# Altium PCB sbattery.PcbDoc (part 2 of 2)
Units mil, origin at the board's own origin, x right, y up, seen from the top; angles counter-clockwise.
Board outline 1265 x 1660 mil, 2 copper layers (Top Layer, Bottom Layer); 16 components, 14 nets, 58 pads, 16 vias.
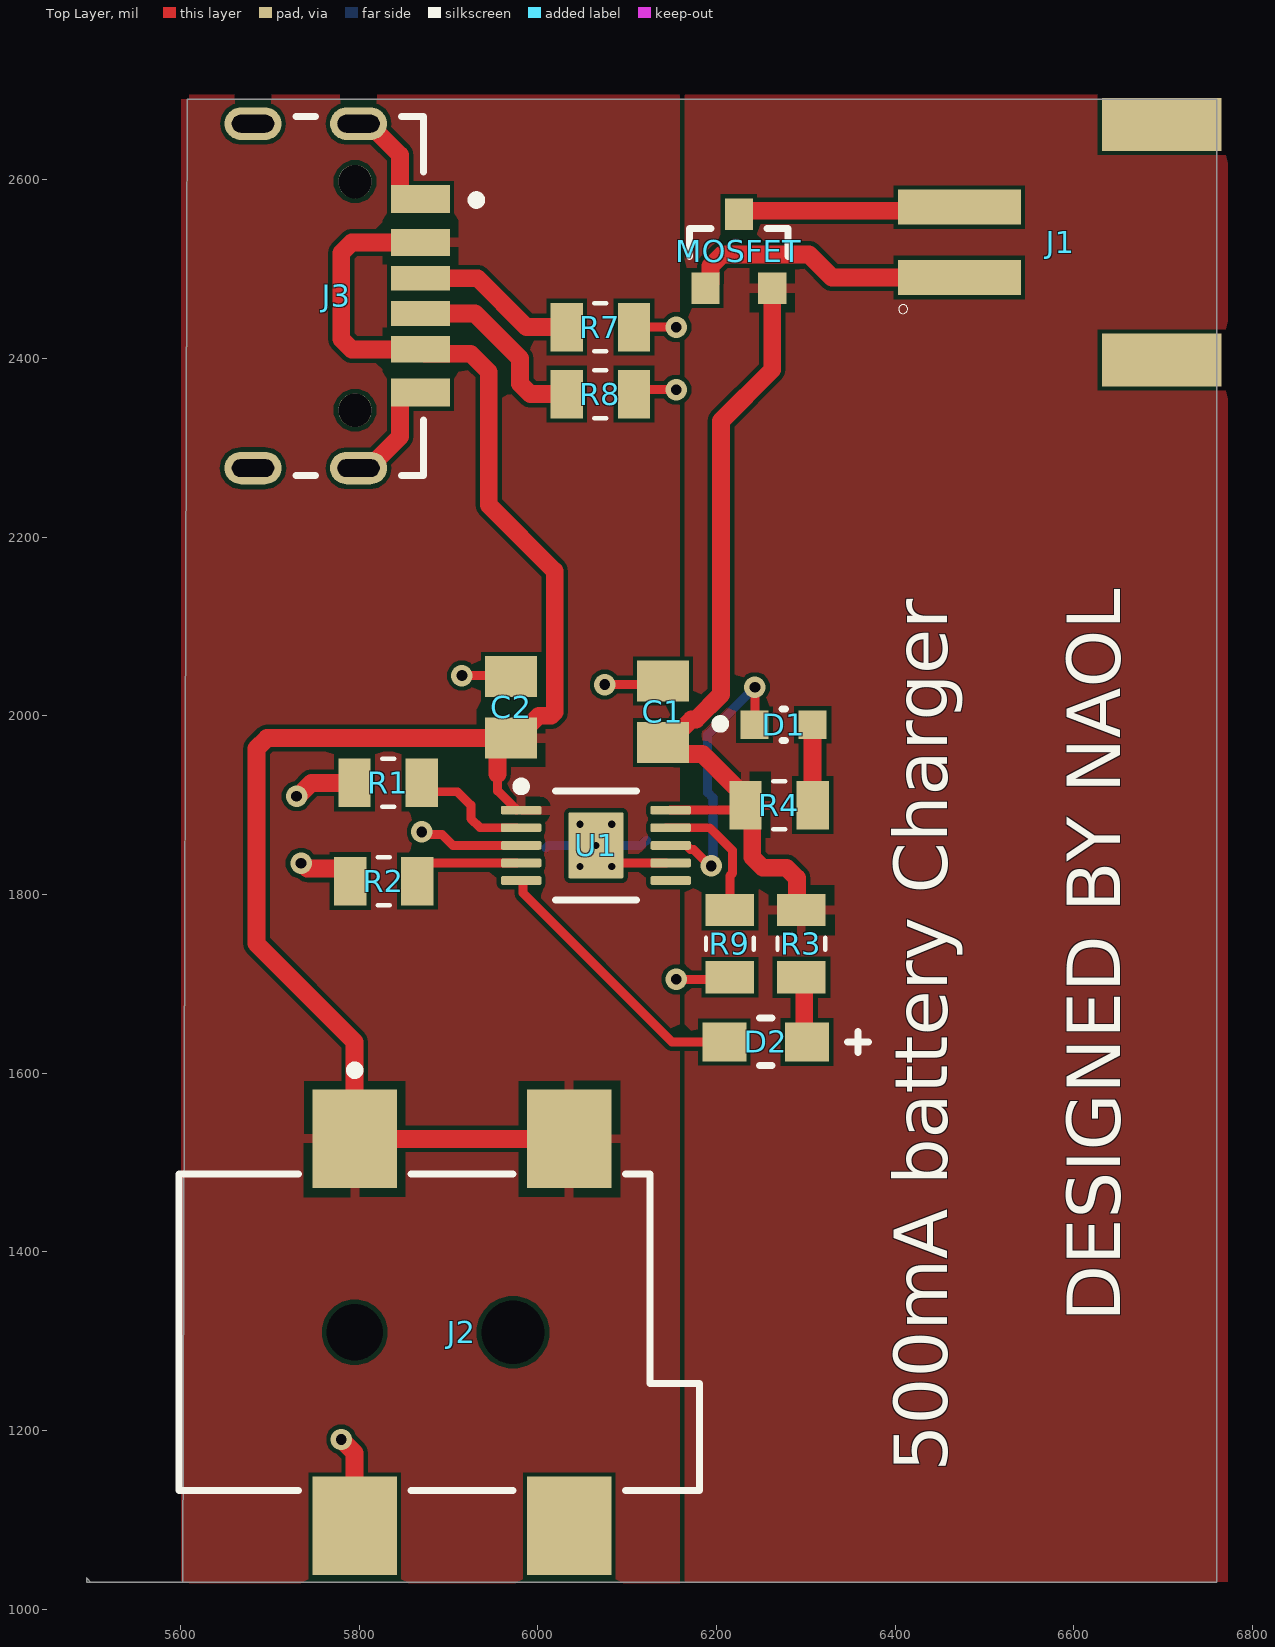
[diagram p0: Top Layer view]

## Part data (continued)
U1: "1-cell, 1-A, Li-ion battery charger with operation over JEITA and 10kΩ NTC 10-HVSSOP -40 to 150", Battery Pack Voltage=4.2V, Case/Package="HTSSOP EP", LCSC part#=C133237, Manufacturer="Texas Instruments", Manufacturer Lifecycle Status=ACTIVE, Max Charge Current=1A, Max Operating Temperature=125°C, Max Supply Voltage=6.45V, Min Input Voltage=4.5V, Min Operating Temperature=-40°C, Min Supply Voltage=3.5V, Supplier Part Number=296-41204-2-ND, Category="Battery Management", ComponentLink1Description=https://sigma.octopart.com:443/151908762/technical_drawing/Texas-Instruments-BQ24092DGQR.pdf?src-supplier=Texas+Instruments, ComponentLink1URL=https://sigma.octopart.com:443/151908762/technical_drawing/Texas-Instruments-BQ24092DGQR.pdf?src-supplier=Texas+Instruments, ComponentLink2Description=https://octopart.com:443/opatz8j6/c1?t=I4L_5yvCBpDFmJzBUD7xXRTyJHZFz8Vie7DDMexhgd_R5CVS8O1brsykVWSszK7PlQIjFRdFbRxs_cy10GZkWLPuEzsvgZTYF2NXEUHmN4sAQxE8bVBEcZC275qzirla-L-oJNJhEX5LmJmM2EXwk3EFsfYROaw8LmrFg9NhT1mx60rvpKNI9a36HI6ThgYwGQRStl18BqKQUrAbhSp5Wi_HxJff8WELpdCqiygBHP7SLygD4TmEifhtn01ouQFK53G1NLqB-fa8Ml_ZKfK0nFnib--2iALwfa4BBLIbsOyNQrybwu1ndBra9hRkefzWYbL7eDaQQPNTeA4Bly6oxRyA0mVZNRxcs2KHaGZXt2978JGPJtvfLop7MU-7fw_S1MKPRM0&src-supplier=Texas+Instruments, ComponentLink2URL=https://octopart.com:443/opatz8j6/c1?t=I4L_5yvCBpDFmJzBUD7xXRTyJHZFz8Vie7DDMexhgd_R5CVS8O1brsykVWSszK7PlQIjFRdFbRxs_cy10GZkWLPuEzsvgZTYF2NXEUHmN4sAQxE8bVBEcZC275qzirla-L-oJNJhEX5LmJmM2EXwk3EFsfYROaw8LmrFg9NhT1mx60rvpKNI9a36HI6ThgYwGQRStl18BqKQUrAbhSp5Wi_HxJff8WELpdCqiygBHP7SLygD4TmEifhtn01ouQFK53G1NLqB-fa8Ml_ZKfK0nFnib--2iALwfa4BBLIbsOyNQrybwu1ndBra9hRkefzWYbL7eDaQQPNTeA4Bly6oxRyA0mVZNRxcs2KHaGZXt2978JGPJtvfLop7MU-7fw_S1MKPRM0&src-supplier=Texas+Instruments, ComponentLink3Description=https://datasheet.octopart.com:443/BQ24092DGQR-Texas-Instruments-datasheet-41204735.pdf?src-supplier=Texas+Instruments, ComponentLink3URL=https://datasheet.octopart.com:443/BQ24092DGQR-Texas-Instruments-datasheet-41204735.pdf?src-supplier=Texas+Instruments, ComponentLink4Description=https://datasheet.octopart.com:443/BQ24092DGQR-Texas-Instruments-datasheet-34153142.pdf?src-supplier=Texas+Instruments, ComponentLink4URL=https://datasheet.octopart.com:443/BQ24092DGQR-Texas-Instruments-datasheet-34153142.pdf?src-supplier=Texas+Instruments, ComponentLink5Description=https://datasheet.octopart.com:443/BQ24092DGQR-Texas-Instruments-datasheet-17535491.pdf?src-supplier=Texas+Instruments, ComponentLink5URL=https://datasheet.octopart.com:443/BQ24092DGQR-Texas-Instruments-datasheet-17535491.pdf?src-supplier=Texas+Instruments, ComponentLink6Description=https://datasheet.octopart.com:443/BQ24092DGQR-Texas-Instruments-datasheet-13303862.pdf?src-supplier=Texas+Instruments, ComponentLink6URL=https://datasheet.octopart.com:443/BQ24092DGQR-Texas-Instruments-datasheet-13303862.pdf?src-supplier=Texas+Instruments, ComponentLink7Description=https://datasheet.octopart.com:443/BQ24092DGQR-Texas-Instruments-datasheet-13064149.pdf?src-supplier=Texas+Instruments, ComponentLink7URL=https://datasheet.octopart.com:443/BQ24092DGQR-Texas-Instruments-datasheet-13064149.pdf?src-supplier=Texas+Instruments, ComponentLink8Description=https://datasheet.octopart.com:443/BQ24092DGQR-Texas-Instruments-datasheet-13055535.pdf?src-supplier=Texas+Instruments, ComponentLink8URL=https://datasheet.octopart.com:443/BQ24092DGQR-Texas-Instruments-datasheet-13055535.pdf?src-supplier=Texas+Instruments, ComponentLink9Description=https://datasheet.octopart.com:443/BQ24092DGQR-Texas-Instruments-datasheet-11473890.pdf?src-supplier=Texas+Instruments, ComponentLink9URL=https://datasheet.octopart.com:443/BQ24092DGQR-Texas-Instruments-datasheet-11473890.pdf?src-supplier=Texas+Instruments, ComponentLink10Description=https://sigma.octopart.com:443/49250729/technical_drawing/Texas-Instruments-BQ24092DGQR.pdf?src-supplier=Texas+Instruments, ComponentLink10URL=https://sigma.octopart.com:443/49250729/technical_drawing/Texas-Instruments-BQ24092DGQR.pdf?src-supplier=Texas+Instruments, ComponentLink11Description=https://datasheet.octopart.com:443/BQ24092DGQR-Texas-Instruments-datasheet-10257820.pdf?src-supplier=Texas+Instruments, ComponentLink11URL=https://datasheet.octopart.com:443/BQ24092DGQR-Texas-Instruments-datasheet-10257820.pdf?src-supplier=Texas+Instruments, ComponentLink12Description=https://datasheet.octopart.com:443/BQ24092DGQR-Texas-Instruments-datasheet-164412855.pdf?src-supplier=SHENGYU+ELECTRONICS, ComponentLink12URL=https://datasheet.octopart.com:443/BQ24092DGQR-Texas-Instruments-datasheet-164412855.pdf?src-supplier=SHENGYU+ELECTRONICS, ComponentLink13Description=https://datasheet.octopart.com:443/BQ24092DGQR-Texas-Instruments-datasheet-137316104.pdf?src-supplier=Future+Electronics, ComponentLink13URL=https://datasheet.octopart.com:443/BQ24092DGQR-Texas-Instruments-datasheet-137316104.pdf?src-supplier=Future+Electronics, ComponentLink14Description=http://sigma.octopart.com:80/reach_statement/Texas-Instruments-company-64.pdf?src-supplier=Compliance+Statements, ComponentLink14URL=http://sigma.octopart.com:80/reach_statement/Texas-Instruments-company-64.pdf?src-supplier=Compliance+Statements, ComponentLink15Description=http://sigma.octopart.com:80/conflict_mineral_statement/Texas-Instruments-company-63.pdf?src-supplier=Compliance+Statements, ComponentLink15URL=http://sigma.octopart.com:80/conflict_mineral_statement/Texas-Instruments-company-63.pdf?src-supplier=Compliance+Statements, Contact Plating=Gold, Fault Protection="Over Temperature, Over Voltage, Short Circuit", Height=1.1mm, Interface=USB, Lead Free="Lead Free", Length=3mm, Lifecycle Status=Production, Manufacturer Part Number=BQ24092DGQR, Number of Cells=1, Output Current=1A, Output Voltage=4.2V, Packaging="Tape & Reel (TR)", Pins=10, Pricing="2500=0.68891, 5000=0.67306, 7500=0.66512, 12500=0.65632 (USD)", Radiation Hardening=No, RoHS=Compliant, Schedule B="8542390000, 8542390000|8542390000|8542390000|8542390000|8542390000", Stock=8548, Supplier=DigiKey, Thickness=1.02mm, Width=3mm

## Via types
v1: diameter 24, hole 12, Top Layer to Bottom Layer, 11 vias
v2: diameter 19.68, hole 7.87, Top Layer to Bottom Layer, 5 vias

## Nets (pads, with @x,y where several pads share a name; then routed paths per layer and width w, separated by ;. In a path a pad name is that pad's centre, name@x,y a point inside that pad or via, vN(x,y) a via of type N, cw(c..) or ccw(c..) an arc to the next point about the centre after c; other vN are vias at no path point)
CHG: D1.1 U1.8 | length 322.3
  Top Layer w10: U1.8 6166.22,1855 6170.98,1850.24 6174.29,1850.24 6192.52,1832 v1(6194,1832) ; D1.1 6243,1990.48 v1(6243,2032)
  Bottom Layer w10: v1(6194,1832) 6196,1834 6196,1908.39 6190,1914.39 6190,1979 v1(6243,2032)
GND: C1.2 C2.2 J2.2 J3.1 J3.2 J3.3 J3.4 J3.C1 J3.C6 R1.1 R2.1 R7.1 R8.1 R9.1 U1.3 U1.7 U1.11 | length 1075.1
  Top Layer w10: v1(5870,1870) 5872.68,1867.32 5892.68,1867.32 5905,1855 U1.3 ; v1(5915,2045) 5968.9,2045 C2.2 ; v1(6075,2035) 6136.1,2035 C1.2 ; U1.11@6077.72,1831.38 6081.65,1835.32 U1.7@6143.66,1835.32 ; R8.1 6112.6,2365 v1(6155,2365) ; R7.1 v1(6155,2435) ; v1(6155,1705) 6212.6,1705 R9.1
  Top Layer w20: v1(5735,1835) 5736.08,1835 5741.89,1829.19 5781.89,1829.19 5790,1821.08 R2.1 ; v1@5735,1913.28 5746.72,1925 R1.1 ; v1(5780,1190) 5795,1175 J2.2 ; J3.2 5810.72,2277.28 5845.93,2312.49 5845.93,2355.98 5851.67,2361.73 J3.C6 ; J3.1 5810.72,2662.72 5845.93,2627.51 5845.93,2584.02 5851.67,2578.27 J3.C1
  Bottom Layer w10: 6009.11,1852.05 6012.07,1855 v2(6065,1855) 6115.76,1855 6121.43,1860.67
  other v1: 5730,1910
  other v2: 6047.28,1831.38 6082.72,1831.38 6047.28,1878.62 6082.72,1878.62
NetD1_2: D1.2 R4.1 | length 90
  Top Layer w20: D1.2 6307.54,1989.94 6307.54,1900.06 R4.1
NetD2_1: D2.1 R3.1 | length 75
  Top Layer w20: R3.1 6298.13,1704.27 6298.13,1638.13 D2.1
NetJ1_1: J1.1 MOSFET.1 | length 321.6
  Top Layer w20: MOSFET.1 6193.35,2484.41 6193.35,2503.28 6206.44,2516.38 6303.62,2516.38 6329.37,2490.63 J1.1
NetJ1_2: J1.2 MOSFET.3 | length 250.1
  Top Layer w20: MOSFET.3 6229.02,2565.35 6467.8,2565.35 J1.2
NetJ3_C3: J3.C3 R7.2 | length 186.3
  Top Layer w20: J3.C3 5932.74,2489.68 5987.43,2435 R7.2
NetJ3_C4: J3.C4 R8.2 | length 217.6
  Top Layer w20: J3.C4 5929.69,2450.32 5980,2400 5980,2371.72 5991.72,2360 R8.2
NetR1_2: R1.2 U1.2 | length 134.2
  Top Layer w10: R1.2@5867.6,1915 5910,1915 5925,1900 5925,1885 5935.31,1874.69 U1.2@5976.34,1874.69
NetR2_2: R2.2 U1.4 | length 123.8
  Top Layer w10: R2.2 5865.2,1822.2 5878.31,1835.32 5904.68,1835.32 U1.4@5976.34,1835.32
NetR9_2: R9.2 U1.9 | length 152.7
  Top Layer w10: U1.9@6143.66,1874.69 6192.43,1874.69 6218,1849.11 6218,1823.91 6215,1820.91 R9.2
PG: D2.2 U1.5 | length 310.5
  Top Layer w10: U1.5 5983.43,1815.63 5983.51,1815.55 5983.51,1801.49 6150,1635 D2.2
VCC: C2.1 J2.1 J3.C2 J3.C5 U1.1 | length 1949.8
  Top Layer w10: 5955,1935 5955,1916.02 U1.1@5976.34,1894.69
  Top Layer w20: J3.C2 5791.72,2529.84 5780,2518.13 5780,2421.72 5791.72,2410 5868.64,2410 J3.C5 5873.76,2405.2 5924.8,2405.2 5945,2385 5945,2235.86 6018.94,2161.92 6018.94,2003.94 6015,2000 6001.1,2000 5976.1,1975 C2.1 C2.1@5967.83,1975 ; 5955,1935 5955,1962.17 C2.1@5967.83,1975 ; J2.1@6035.16,1526.54 5795,1526.54 5795,1635 5685,1745 5685,1963.28 5696.72,1975 C2.1@5967.83,1975
VOUT: C1.1 MOSFET.2 R3.2 R4.2 U1.10 | length 954.5
  Top Layer w10: C1.1 C1.1@6151.98,1958.02 ; U1.10 6226.77,1894.37 R4.2
  Top Layer w20: MOSFET.2 6262.4,2387.4 6205,2330 6205,2023.84 6177.22,1996.06 6172.17,1996.06 6146.1,1970 C1.1 6152.83,1957.17 6184.29,1957.17 6232.4,1909.06 R4.2 6240,1892.4 6240,1841.72 6251.72,1830 6278.28,1830 6290,1818.28 6290,1787.6 R3.2
pads on no net: J1.P1 J1.P2 J2.3 J2.MH1 J2.MH2 J3. U1.6

## Polygon pours and split planes (outlines as drawn)
VOUT on Top Layer "VOUT" (solid, pour order 2): 6158,2695 6768,2695 6772,2699 6772,1031 6161,1031 6159,1029 6158,1030
VCC on Top Layer "VCC" (solid, pour order 1): 5610,2690 5610,2695 6158,2695 6159,2694 6159,1029 5602,1029 5600,1031 5601,1032 5601,2690
GND on Bottom Layer "GND" (solid, pour order 0): 5610,2690 5615,2695 6772,2695 6772,1030 5600,1030

## Silkscreen, mask and mechanical layers (free items; w line width, h text height)
Top Overlay:
  text "DESIGNED BY NAOL" at 6652,1322 h60 r90
  text "500mA battery Charger" at 6458.01,1154 h60 r90